# Altium PCB ShutdownDPDT-P01-V01.PcbDoc
Units mm, origin at the board's own origin, x right, y up, seen from the top; angles counter-clockwise.
Board outline 227 x 54.1 mm, 2 copper layers (Top Layer, Bottom Layer); 90 components, 111 nets, 414 pads, 30 vias.
Unrouted connection lines stored in the file: 24.
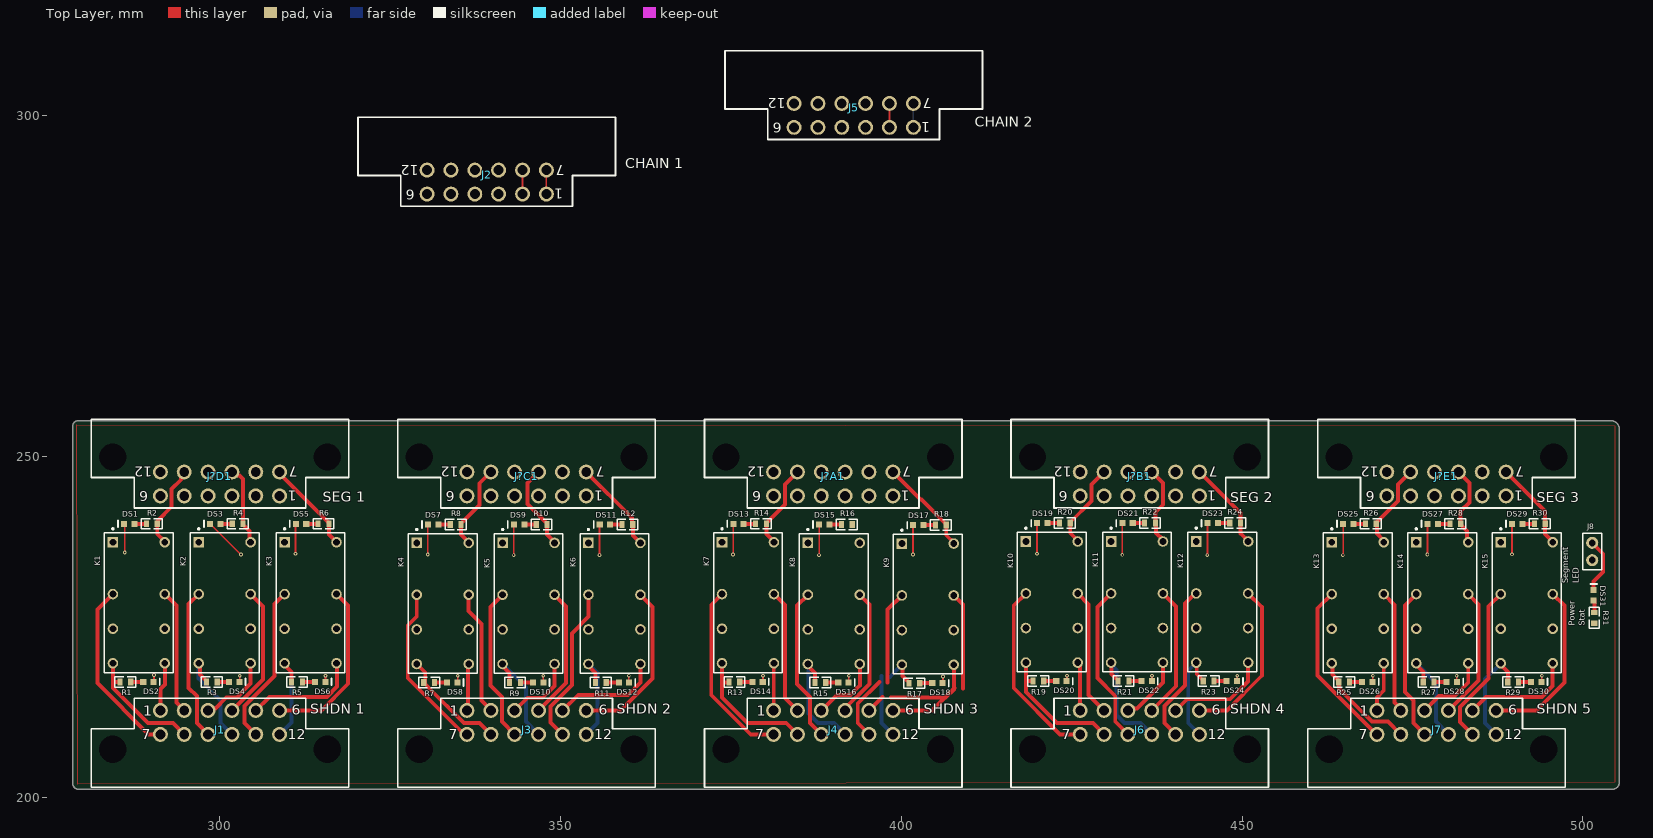
[diagram p0: Top Layer view]
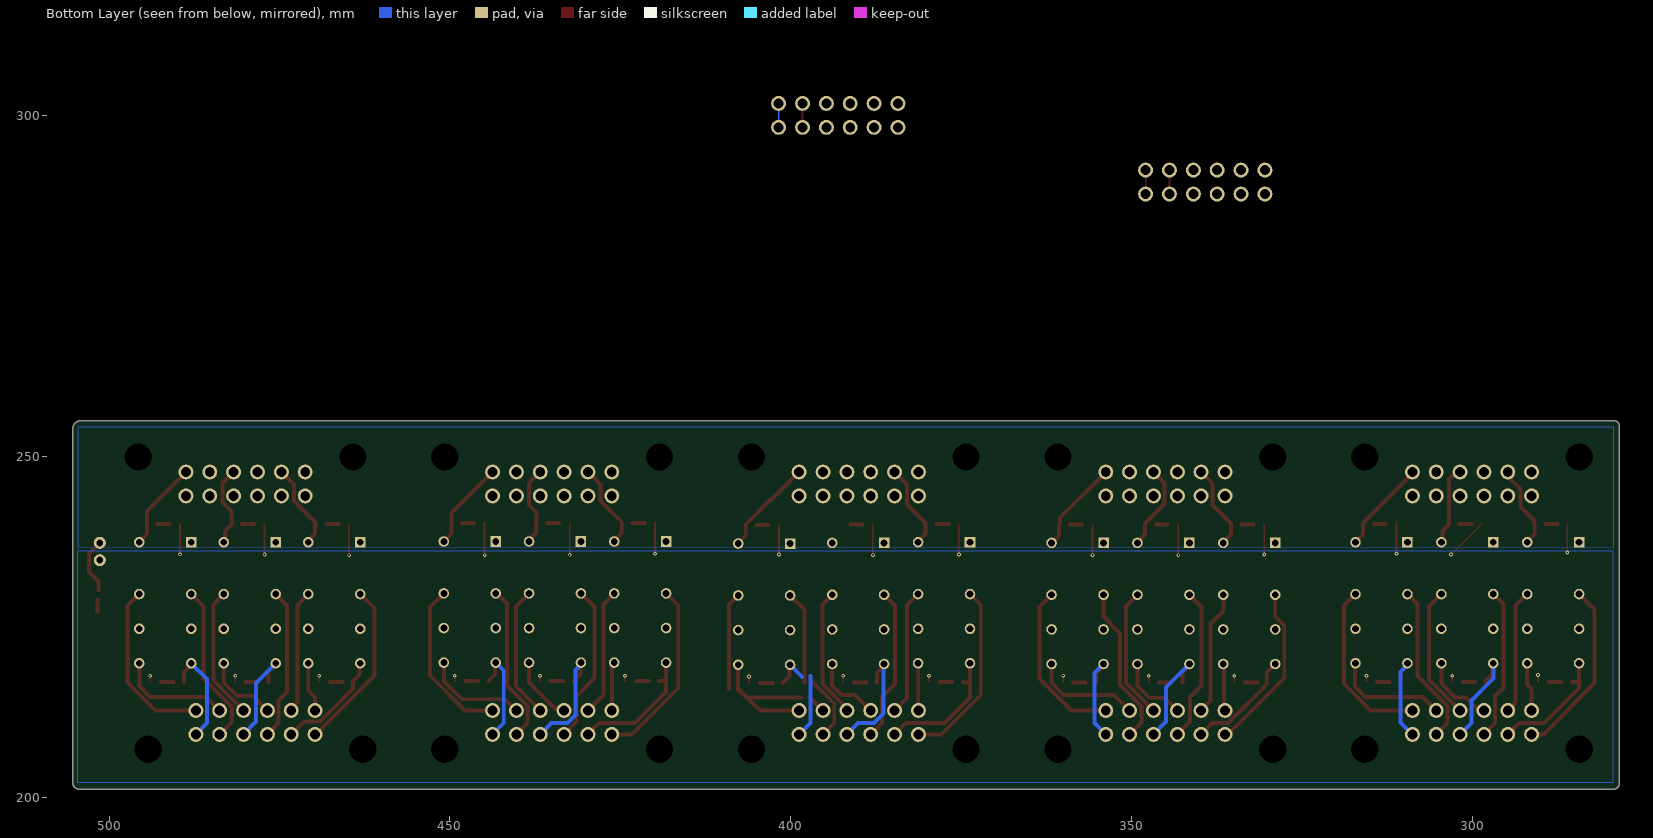
[diagram p1: Bottom Layer view, seen from below]
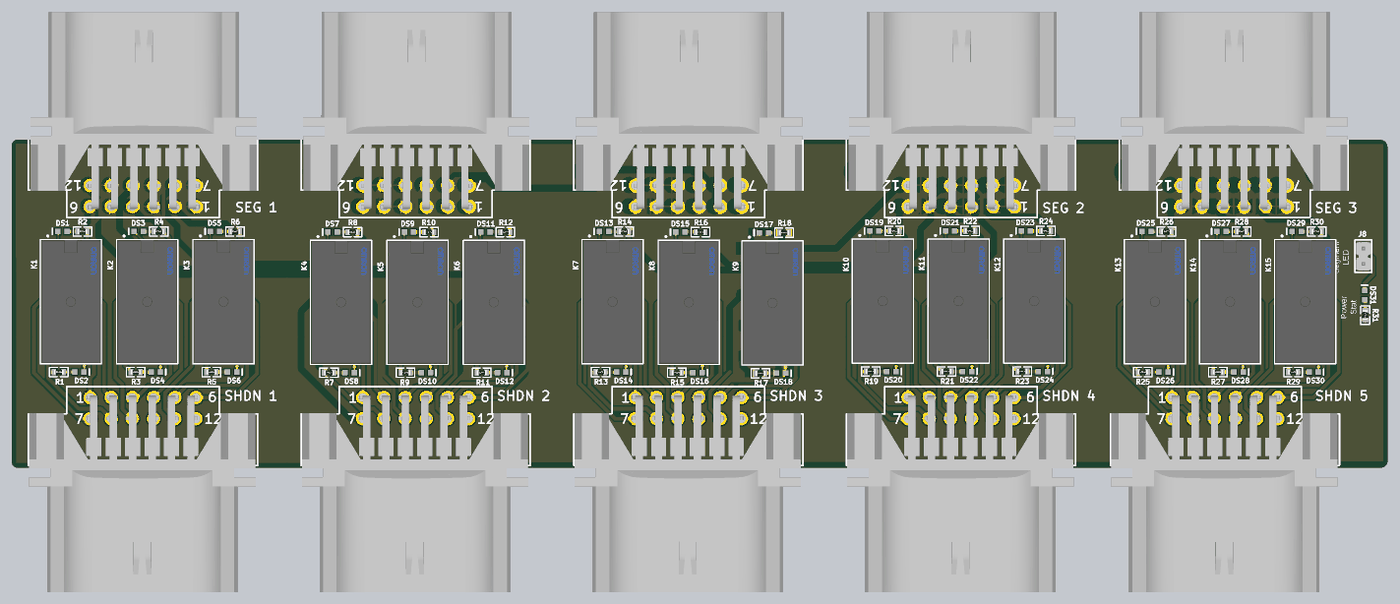
[diagram p2: 3D render of the assembled board from above, using the file's embedded part models]

## Layer stack, top to bottom
Top Solder: solder mask 0.0102, Solder Resist, Dk 3.5
Top Layer: signal copper 0.0356
Dielectric 1: dielectric 0.32, FR-4, Dk 4.8
Bottom Layer: signal copper 0.0356
Bottom Solder: solder mask 0.0102, Solder Resist, Dk 3.5

## Board outline
278.378,201.954 278.378,254.3 278.378,254.429 cw(c279.19,254.416) 279.203,255.229 504.128,255.229 cw(c504.128,253.979) 505.378,253.979 505.378,253.9 505.378,202.149 cw(c504.358,202.149) 504.358,201.129 279.303,201.129 cw(c279.253,202.004)

## Design rules (kind name [scope] priority, off if disabled: settings)
Clearance [All] p1: gap=0.254 ignorepadtopadclearanceinfootprint=FALSE except(0: Arc-Hole Track-Hole SMDPad-Hole THPad-Hole Via-Hole Fill-Hole Poly-Hole Region-Hole Text-Hole)
PlaneConnect PlaneConnect_1 [InNet('12V')] p1: planeconnectstyle=Direct reliefexpansion=0.508 reliefentries=4 reliefconductorwidth=0.254 reliefairgap=0.254
PlaneConnect [All] p2: planeconnectstyle=Direct reliefexpansion=0.508 reliefentries=4 reliefconductorwidth=0.254 reliefairgap=0.254
PolygonConnect "12V Rule" [InNet('12V')] p1: thpad.connectstyle=Relief thpad.reliefconductorwidth=0.254 thpad.reliefentries=4 thpad.polygonreliefangle="90 Angle" thpad.airgapwidth=0.254 smdpad.connectstyle=Relief smdpad.reliefconductorwidth=0.254 smdpad.reliefentries=4 smdpad.polygonreliefangle="90 Angle" smdpad.airgapwidth=0.254 via.connectstyle=Direct via.reliefconductorwidth=0.254 via.reliefentries=4 via.polygonreliefangle="90 Angle" via.airgapwidth=0.254
PolygonConnect [All] p2: thpad.connectstyle=Relief thpad.reliefconductorwidth=0.254 thpad.reliefentries=4 thpad.polygonreliefangle="90 Angle" thpad.airgapwidth=0.254 smdpad.connectstyle=Relief smdpad.reliefconductorwidth=0.254 smdpad.reliefentries=4 smdpad.polygonreliefangle="90 Angle" smdpad.airgapwidth=0.254 via.connectstyle=Direct via.reliefconductorwidth=0.254 via.reliefentries=4 via.polygonreliefangle="90 Angle" via.airgapwidth=0.254
RoomDefinition RelayGroup5 [InComponentClass('RelayGroup5')] p1 off: confinementstyle=ConfineIn formatcopy=TRUE lockcomponents=FALSE outline 506.499,359.299 540.899,359.299 540.899,399.699 506.499,399.699
RoomDefinition RelayGroup4 [InComponentClass('RelayGroup4')] p2 off: confinementstyle=ConfineIn formatcopy=TRUE lockcomponents=FALSE outline 280.8,180 319.7,180 319.7,281.5 280.8,281.5
RoomDefinition RelayGroup3 [InComponentClass('RelayGroup3')] p3 off: confinementstyle=ConfineIn formatcopy=TRUE lockcomponents=FALSE outline 506.499,279.899 540.899,279.899 540.899,320.299 506.499,320.299
RoomDefinition RelayGroup2 [InComponentClass('RelayGroup2')] p4 off: confinementstyle=ConfineIn formatcopy=TRUE lockcomponents=FALSE outline 506.499,240.2 540.899,240.2 540.899,280.599 506.499,280.599
RoomDefinition RelayGroup1 [InComponentClass('RelayGroup1')] p5 off: confinementstyle=ConfineIn formatcopy=TRUE lockcomponents=FALSE outline 506.499,200.6 540.899,200.6 540.899,241 506.499,241
RoomDefinition DPDT_Relay_15 [InComponentClass('DPDT_Relay_15')] p6: confinementstyle=ConfineIn formatcopy=TRUE lockcomponents=FALSE outline 351,214.5 363.3,214.5 363.3,242.3 351,242.3
RoomDefinition DPDT_Relay_16 [InComponentClass('DPDT_Relay_16')] p7: confinementstyle=ConfineIn formatcopy=TRUE lockcomponents=FALSE outline 325.8,214.5 338.1,214.5 338.1,242.3 325.8,242.3
RoomDefinition DPDT_Relay_11 [InComponentClass('DPDT_Relay_11')] p8: confinementstyle=ConfineIn formatcopy=TRUE lockcomponents=FALSE outline 397,214.4 409.3,214.4 409.3,242.2 397,242.2
RoomDefinition DPDT_Relay_19 [InComponentClass('DPDT_Relay_19')] p9: confinementstyle=ConfineIn formatcopy=TRUE lockcomponents=FALSE outline 484.9,214.6 497.2,214.6 497.2,242.4 484.9,242.4
RoomDefinition DPDT_Relay_12 [InComponentClass('DPDT_Relay_12')] p10: confinementstyle=ConfineIn formatcopy=TRUE lockcomponents=FALSE outline 370.6,214.6 382.9,214.6 382.9,242.4 370.6,242.4
RoomDefinition DPDT_Relay_14 [InComponentClass('DPDT_Relay_14')] p11: confinementstyle=ConfineIn formatcopy=TRUE lockcomponents=FALSE outline 415.2,214.7 427.5,214.7 427.5,242.5 415.2,242.5
RoomDefinition DPDT_Relay_22 [InComponentClass('DPDT_Relay_22')] p12: confinementstyle=ConfineIn formatcopy=TRUE lockcomponents=FALSE outline 427.7,214.7 440,214.7 440,242.5 427.7,242.5
RoomDefinition DPDT_Relay_13 [InComponentClass('DPDT_Relay_13')] p13: confinementstyle=ConfineIn formatcopy=TRUE lockcomponents=FALSE outline 440.2,214.7 452.5,214.7 452.5,242.5 440.2,242.5
RoomDefinition DPDT_Relay_21 [InComponentClass('DPDT_Relay_21')] p14: confinementstyle=ConfineIn formatcopy=TRUE lockcomponents=FALSE outline 383.2,214.5 395.5,214.5 395.5,242.3 383.2,242.3
RoomDefinition DPDT_Relay_18 [InComponentClass('DPDT_Relay_18')] p15: confinementstyle=ConfineIn formatcopy=TRUE lockcomponents=FALSE outline 281.2,214.6 293.5,214.6 293.5,242.4 281.2,242.4
RoomDefinition DPDT_Relay_17 [InComponentClass('DPDT_Relay_17')] p16: confinementstyle=ConfineIn formatcopy=TRUE lockcomponents=FALSE outline 306.4,214.6 318.7,214.6 318.7,242.4 306.4,242.4
RoomDefinition DPDT_Relay_23 [InComponentClass('DPDT_Relay_23')] p17: confinementstyle=ConfineIn formatcopy=TRUE lockcomponents=FALSE outline 338.4,214.5 350.7,214.5 350.7,242.3 338.4,242.3
RoomDefinition DPDT_Relay_24 [InComponentClass('DPDT_Relay_24')] p18: confinementstyle=ConfineIn formatcopy=TRUE lockcomponents=FALSE outline 293.8,214.6 306.1,214.6 306.1,242.4 293.8,242.4
RoomDefinition DPDT_Relay_25 [InComponentClass('DPDT_Relay_25')] p19: confinementstyle=ConfineIn formatcopy=TRUE lockcomponents=FALSE outline 472.5,214.6 484.8,214.6 484.8,242.4 472.5,242.4
RoomDefinition DPDT_Relay_110 [InComponentClass('DPDT_Relay_110')] p20: confinementstyle=ConfineIn formatcopy=TRUE lockcomponents=FALSE outline 460.1,214.6 472.4,214.6 472.4,242.4 460.1,242.4
RoomDefinition ShutdownDPDT-S01-V00 [InComponentClass('ShutdownDPDT-S01-V00')] p21 off: confinementstyle=ConfineIn formatcopy=TRUE lockcomponents=FALSE outline 178.943,24.892 248.666,24.892 248.666,65.278 178.943,65.278
RoutingVias [All] p1: holewidth=0.711 width=1.27 viastyle="Through Hole" minholewidth=0.711 minwidth=1.27 maxholewidth=0.711 maxwidth=1.27
SolderMaskExpansion [All] p1: expansion=0.102 istentingtop=FALSE
Width [All] p1: maxlimit=0.58 minlimit=0.254 preferedwidth=0.254 minimp=50.000000 maximp=50.000000 favimp=50.000000
29 further rules are at their usual default settings.

## Classes and differential pairs
component class RelayGroup5: J7 J?E1
component class RelayGroup4: J1 J?D1
component class RelayGroup3: J3 J?C1
component class RelayGroup2: J6 J?B1
component class RelayGroup1: J4 J?A1
component class DPDT_Relay_110: DS25 DS26 K13 R25 R26
component class DPDT_Relay_25: DS27 DS28 K14 R27 R28
component class DPDT_Relay_19: DS29 DS30 K15 R29 R30
component class DPDT_Relay_11: DS17 DS18 K9 R17 R18
component class DPDT_Relay_18: DS1 DS2 K1 R1 R2
component class DPDT_Relay_16: DS7 DS8 K4 R7 R8
channel class ShutdownDPDT-S04-V00-RelayGroup: C1 C2 C3 C4
channel class ShutdownDPDT-S02-V00-Relay: DPDT_Relay_12 DPDT_Relay_13 DPDT_Relay_14 DPDT_Relay_15 DPDT_Relay_17 DPDT_Relay_21 DPDT_Relay_22 DPDT_Relay_23 DPDT_Relay_24 DPDT_Relay_31 DPDT_Relay_32
component class ShutdownDPDT-S01-V00: DS31 J2 J8 R31
component class DPDT_Relay_17: DS5 DS6 K3 R5 R6
component class DPDT_Relay_15: DS11 DS12 K6 R11 R12
component class DPDT_Relay_24: DS3 DS4 K2 R3 R4
component class DPDT_Relay_23: DS9 DS10 K5 R9 R10
component class DPDT_Relay_22: DS21 DS22 K11 R21 R22
component class DPDT_Relay_21: DS15 DS16 K8 R15 R16
component class DPDT_Relay_14: DS19 DS20 K10 R19 R20
component class DPDT_Relay_13: DS23 DS24 K12 R23 R24
component class DPDT_Relay_12: DS13 DS14 K7 R13 R14

## Components (designator, comment, footprint, x,y, rotation, side; value= is the part's Value field where it differs from the comment)
DS1 "LED Red 0603" "LED RED 0603" 286.7,240.1 r180 top
DS2 "LED Red 0603" "LED RED 0603" 289.5,216.9 r0 top
DS3 "LED Red 0603" "LED RED 0603" 299.3,240.1 r180 top (schematic designator DS1)
DS4 "LED Red 0603" "LED RED 0603" 302.1,216.9 r0 top (schematic designator DS2)
DS5 "LED Red 0603" "LED RED 0603" 311.9,240.1 r180 top (schematic designator DS1)
DS6 "LED Red 0603" "LED RED 0603" 314.7,216.9 r0 top (schematic designator DS2)
DS7 "LED Red 0603" "LED RED 0603" 331.3,240 r180 top (schematic designator DS1)
DS8 "LED Red 0603" "LED RED 0603" 334.1,216.8 r0 top (schematic designator DS2)
DS9 "LED Red 0603" "LED RED 0603" 343.9,240 r180 top (schematic designator DS1)
DS10 "LED Red 0603" "LED RED 0603" 346.7,216.8 r0 top (schematic designator DS2)
DS11 "LED Red 0603" "LED RED 0603" 356.5,240 r180 top (schematic designator DS1)
DS12 "LED Red 0603" "LED RED 0603" 359.3,216.8 r0 top (schematic designator DS2)
DS13 "LED Red 0603" "LED RED 0603" 376.1,240.1 r180 top (schematic designator DS1)
DS14 "LED Red 0603" "LED RED 0603" 378.9,216.9 r0 top (schematic designator DS2)
DS15 "LED Red 0603" "LED RED 0603" 388.7,240 r180 top (schematic designator DS1)
DS16 "LED Red 0603" "LED RED 0603" 391.5,216.8 r0 top (schematic designator DS2)
DS17 "LED Red 0603" "LED RED 0603" 402.5,239.9 r180 top (schematic designator DS1)
DS18 "LED Red 0603" "LED RED 0603" 405.3,216.7 r0 top (schematic designator DS2)
DS19 "LED Red 0603" "LED RED 0603" 420.7,240.2 r180 top (schematic designator DS1)
DS20 "LED Red 0603" "LED RED 0603" 423.5,217 r0 top (schematic designator DS2)
DS21 "LED Red 0603" "LED RED 0603" 433.2,240.2 r180 top (schematic designator DS1)
DS22 "LED Red 0603" "LED RED 0603" 436,217 r0 top (schematic designator DS2)
DS23 "LED Red 0603" "LED RED 0603" 445.7,240.2 r180 top (schematic designator DS1)
DS24 "LED Red 0603" "LED RED 0603" 448.5,217 r0 top (schematic designator DS2)
DS25 "LED Red 0603" "LED RED 0603" 465.6,240.1 r180 top (schematic designator DS1)
DS26 "LED Red 0603" "LED RED 0603" 468.4,216.9 r0 top (schematic designator DS2)
DS27 "LED Red 0603" "LED RED 0603" 478,240.1 r180 top (schematic designator DS1)
DS28 "LED Red 0603" "LED RED 0603" 480.8,216.9 r0 top (schematic designator DS2)
DS29 "LED Red 0603" "LED RED 0603" 490.4,240.1 r180 top (schematic designator DS1)
DS30 "LED Red 0603" "LED RED 0603" 493.2,216.9 r0 top (schematic designator DS2)
DS31 "LED Green 0603" "LED GREEN 0603" 501.6,229.6 r90 top (schematic designator DS3)
J1 "MX120G" MX120G 300,212.7 r0 top (schematic designator J3)
J2 "MX120G" MX120G 339.15,288.5 r180 top
J3 "MX120G" MX120G 345,212.7 r0 top
J4 "MX120G" MX120G 390,212.7 r0 top (schematic designator J3)
J5 "MX120G" MX120G 393.009,298.288 r180 top (schematic designator J1)
J6 "MX120G" MX120G 435,212.7 r0 top (schematic designator J3)
J7 "MX120G" MX120G 478.55,212.7 r0 top (schematic designator J3)
J8 "Jumper 2Way Pins" Jumper_2Way_Pin 501.4,237.3 r90 top (schematic designator J5)
J?A1 "MX120G" MX120G 390,244.2 r180 top (schematic designator J?)
J?B1 "MX120G" MX120G 435,244.2 r180 top (schematic designator J?)
J?C1 "MX120G" MX120G 345,244.2 r180 top (schematic designator J?)
J?D1 "MX120G" MX120G 300,244.2 r180 top (schematic designator J?)
J?E1 "MX120G" MX120G 480,244.2 r180 top (schematic designator J?)
K1 "G5V-2-DC12" FP-G5V-2-DC12-MFG 288.09,228.51 r270 top
K2 "G5V-2-DC12" FP-G5V-2-DC12-MFG 300.69,228.51 r270 top (schematic designator K1)
K3 "G5V-2-DC12" FP-G5V-2-DC12-MFG 313.29,228.51 r270 top (schematic designator K1)
K4 "G5V-2-DC12" FP-G5V-2-DC12-MFG 332.69,228.41 r270 top (schematic designator K1)
K5 "G5V-2-DC12" FP-G5V-2-DC12-MFG 345.29,228.41 r270 top (schematic designator K1)
K6 "G5V-2-DC12" FP-G5V-2-DC12-MFG 357.89,228.41 r270 top (schematic designator K1)
K7 "G5V-2-DC12" FP-G5V-2-DC12-MFG 377.49,228.51 r270 top (schematic designator K1)
K8 "G5V-2-DC12" FP-G5V-2-DC12-MFG 390.09,228.41 r270 top (schematic designator K1)
K9 "G5V-2-DC12" FP-G5V-2-DC12-MFG 403.89,228.31 r270 top (schematic designator K1)
K10 "G5V-2-DC12" FP-G5V-2-DC12-MFG 422.09,228.61 r270 top (schematic designator K1)
K11 "G5V-2-DC12" FP-G5V-2-DC12-MFG 434.59,228.61 r270 top (schematic designator K1)
K12 "G5V-2-DC12" FP-G5V-2-DC12-MFG 447.09,228.61 r270 top (schematic designator K1)
K13 "G5V-2-DC12" FP-G5V-2-DC12-MFG 466.99,228.51 r270 top (schematic designator K1)
K14 "G5V-2-DC12" FP-G5V-2-DC12-MFG 479.39,228.51 r270 top (schematic designator K1)
K15 "G5V-2-DC12" FP-G5V-2-DC12-MFG 491.79,228.51 r270 top (schematic designator K1)
R1 "1k 5% 0603" Res_ThinFilm_0603 286.1,216.9 r180 top (schematic designator R2)
R2 "1k 5% 0603" Res_ThinFilm_0603 290,240.1 r0 top (schematic designator R1)
R3 "1k 5% 0603" Res_ThinFilm_0603 298.8,216.9 r180 top (schematic designator R2)
R4 "1k 5% 0603" Res_ThinFilm_0603 302.6,240.1 r0 top (schematic designator R1)
R5 "1k 5% 0603" Res_ThinFilm_0603 311.3,216.9 r180 top (schematic designator R2)
R6 "1k 5% 0603" Res_ThinFilm_0603 315.2,240.1 r0 top (schematic designator R1)
R7 "1k 5% 0603" Res_ThinFilm_0603 330.7,216.8 r180 top (schematic designator R2)
R8 "1k 5% 0603" Res_ThinFilm_0603 334.6,240 r0 top (schematic designator R1)
R9 "1k 5% 0603" Res_ThinFilm_0603 343.3,216.8 r180 top (schematic designator R2)
R10 "1k 5% 0603" Res_ThinFilm_0603 347.2,240 r0 top (schematic designator R1)
R11 "1k 5% 0603" Res_ThinFilm_0603 355.9,216.8 r180 top (schematic designator R2)
R12 "1k 5% 0603" Res_ThinFilm_0603 359.8,240 r0 top (schematic designator R1)
R13 "1k 5% 0603" Res_ThinFilm_0603 375.5,216.9 r180 top (schematic designator R2)
R14 "1k 5% 0603" Res_ThinFilm_0603 379.4,240.1 r0 top (schematic designator R1)
R15 "1k 5% 0603" Res_ThinFilm_0603 388.1,216.8 r180 top (schematic designator R2)
R16 "1k 5% 0603" Res_ThinFilm_0603 392,240 r0 top (schematic designator R1)
R17 "1k 5% 0603" Res_ThinFilm_0603 401.9,216.7 r180 top (schematic designator R2)
R18 "1k 5% 0603" Res_ThinFilm_0603 405.8,239.9 r0 top (schematic designator R1)
R19 "1k 5% 0603" Res_ThinFilm_0603 420.1,217 r180 top (schematic designator R2)
R20 "1k 5% 0603" Res_ThinFilm_0603 424,240.2 r0 top (schematic designator R1)
R21 "1k 5% 0603" Res_ThinFilm_0603 432.6,217 r180 top (schematic designator R2)
R22 "1k 5% 0603" Res_ThinFilm_0603 436.5,240.2 r0 top (schematic designator R1)
R23 "1k 5% 0603" Res_ThinFilm_0603 445.1,217 r180 top (schematic designator R2)
R24 "1k 5% 0603" Res_ThinFilm_0603 449,240.2 r0 top (schematic designator R1)
R25 "1k 5% 0603" Res_ThinFilm_0603 465,216.9 r180 top (schematic designator R2)
R26 "1k 5% 0603" Res_ThinFilm_0603 468.9,240.1 r0 top (schematic designator R1)
R27 "1k 5% 0603" Res_ThinFilm_0603 477.4,216.9 r180 top (schematic designator R2)
R28 "1k 5% 0603" Res_ThinFilm_0603 481.3,240.1 r0 top (schematic designator R1)
R29 "1k 5% 0603" Res_ThinFilm_0603 489.8,216.9 r180 top (schematic designator R2)
R30 "1k 5% 0603" Res_ThinFilm_0603 493.7,240.1 r0 top (schematic designator R1)
R31 "10k 1% 0603" Res_ThinFilm_0603 501.7,226.3 r270 top (schematic designator R3)

## Footprints (in the part's own frame and the unit in brackets; to place one, negate y for a bottom-side part, rotate by r counter-clockwise, add the part's x,y. Pads: shape width x height; smd on the part's side, far side on the other; paste and mask are expansions set on the pad)
FP-G5V-2-DC12-MFG [mm]
  rect 1.55x1.55 hole 1 paste-1000 mask+0: 1(-8.89,-3.81)
  round 1.55 hole 1 paste-1000 mask+0: 4(-1.27,-3.81) 6(3.81,-3.81) 8(8.89,-3.81) 9(8.89,3.81) 11(3.81,3.81) 13(-1.27,3.81) 16(-8.89,3.81)
  silkscreen extent -10.97,-5.05 10.25,5.05, body extent -10.35,-5.15 10.35,5.15, height 0.25
Jumper_2Way_Pin [mil]
  round 70 hole 40: 1(-100,0) 2(0,0)
  silkscreen extent -155,-55 55,55, body extent -142,-48 42,47, height 332
"LED GREEN 0603" [mil]
  rect 35x35 smd: 1(-30,0) 2(30,0)
  silkscreen extent 65,-20 65,20, body extent -40,-20 40,20, height 30
"LED RED 0603" [mil]
  rect 35x35 smd: 1(-30,0) 2(30,0)
  silkscreen extent 65,-20 65,20, body extent -40,-20 40,20, height 30
MX120G [mm]
  round 2.2 hole 1.45: 1(-8.75,0) 2(-5.25,0) 3(-1.75,0) 4(1.75,0) 5(5.25,0) 6(8.75,0) 7(-8.75,-3.5) 8(-5.25,-3.5) 9(-1.75,-3.5) 10(1.75,-3.5) 11(5.25,-3.5) 12(8.75,-3.5)
  round 0 hole 4 mask+0.254: NC(-15.75,-5.7) NC(15.75,-5.7)
  silkscreen extent -18.9,-11.25 18.9,1.8, body extent -18.78,-32.1 18.58,0.36, height 24.48
Res_ThinFilm_0603 [mil]
  rect 30x40 smd: 1(-31.24,0) 2(31.24,0)
  silkscreen extent -60,-30 60,30, body extent -31,-16 32,16, height 18

## Part data
J1 J2 J3 J4 J5 J6 J7 J?A1 J?B1 J?C1 J?D1 J?E1: "MX120G with standard connector layout"
J8: library part "Jumper 2Way Vert Pins", "Jumper 2Way Vert Pins"
K1 K2 K3 K4 K5 K6 K7 K8 K9 K10 K11 K12 K13 K14 K15: library part CMP-08823-000082-1, "RELAY GEN PURPOSE DPDT 2A 12VDC", Case/Package=DIP, Coil Current=41.7mA, Coil Power=500mW, Coil Resistance=288R, Coil Voltage (DC)=12V, Contact Current Rating=2A, Manufacturer Series=G5V-2, Max Operating Temperature=65°C, Max Voltage Rating (AC)=125V, Min Operating Temperature=-25°C, Package Quantity=25, Approvals=UL, Coil Type=Non-Latching, Contact Material=Gold, Current Rating=2A, Depth=10.1mm, Height=11.5mm, Lead Free="Lead Free", Length=20.5mm, Max Current Rating=2A, Max Voltage Rating (DC)=125V, Mount="Through Hole", Number of Pins=8, Operate Time=7ms, Packaging=Rail/Tube, Power Consumption=500mW, Power Rating=500mW, Radiation Hardening=No, Reference Standard=UL, Relay Action=MOMENTARY, Relay Function=DPDT, Relay Type="General Purpose", Release Time=3ms, Series=G5V-2, Termination="PC Pin", Throw Configuration=DPDT, Type=Electromechanical, Voltage Rating (AC)=125V, Voltage Rating (DC)=125V, Weight=5g, Width=10.1mm
R1 R2 R3 R4 R5 R6 R7 R8 R9 R10 R11 R12 R13 R14 R15 R16 R17 R18 R19 R20 R21 R22 R23 R24 R25 R26 R27 R28 R29 R30: "Resistor, SMD, 1k, 0.1W, 5%, 0603"
R31: "Resistor, SMD, 10k, 0.1W, 1%, 0603"

## Via types
v1: diameter 0.55, hole 0.279, Top Layer to Bottom Layer, 30 vias

## Nets (pads, with @x,y where several pads share a name; then routed paths per layer and width w, separated by ;. In a path a pad name is that pad's centre, name@x,y a point inside that pad or via, vN(x,y) a via of type N, cw(c..) or ccw(c..) an arc to the next point about the centre after c; other vN are vias at no path point)
12V: J2.4 J2.5 J2.10 J2.11 J5.4 J5.5 J5.10 J5.11 J?A1.8 J?A1.10 J?A1.12 J?B1.8 J?B1.10 J?B1.12 J?C1.8 J?C1.10 J?C1.12 J?D1.8 J?D1.10 J?D1.12 J?E1.8 J?E1.10 J?E1.12 R31.2
CANH: J2.2 J2.8 J5.2 J5.8 | length 7
  Top Layer w0.254: J2.2 J2.8 ; J5.2 J5.8
CANL: J2.1 J2.7 J5.1 J5.7 | length 7
  Top Layer w0.254: J2.1 J2.7
  Bottom Layer w0.254: J5.1 J5.7
DET_IN_1A: J4.2 K7.13 | length 18.5
  Top Layer w0.58: K7.13 382.9,228.18 382.9,214.55 J4.2
DET_IN_1B: J6.2 K10.13 | length 18.8
  Top Layer w0.58: K10.13 427.5,228.28 427.5,214.95 J6.2
DET_IN_1C: J3.2 K4.13 | length 18.3
  Top Layer w0.58: K4.13 336.5,227.3 338.4,225.4 338.4,214.136 339.75,212.786 J3.2
DET_IN_1D: J1.2 K1.13 | length 18.3
  Top Layer w0.58: K1.13 293.6,228.08 293.6,213.85 J1.2
DET_IN_1E: J7.2 K13.13 | length 18.1
  Top Layer w0.58: K13.13 472.4,228.18 472.4,213.85 473.3,212.95 J7.2
DET_IN_2A: J4.4 K8.13 | length 19
  Top Layer w0.58: J4.4 391.75,213.029 395.3,216.579 395.3,228.28 K8.13
DET_IN_2B: J6.4 K11.13 | length 19.4
  Top Layer w0.58: J6.4 436.75,212.704 440.3,216.254 440.3,227.98 K11.13
DET_IN_2C: J3.4 K5.13 | length 19.4
  Top Layer w0.58: J3.4 346.75,212.704 350.8,216.754 350.8,227.98 K5.13
DET_IN_2D: J1.4 K2.13 | length 19.7
  Top Layer w0.58: J1.4 301.75,212.704 306.3,217.254 306.3,227.98 K2.13
DET_IN_2E: J7.4 K14.13 | length 19.5
  Top Layer w0.58: J7.4 480.3,212.704 484.7,217.104 484.7,228.28 K14.13
DET_IN_3A: J4.6 K9.13 | length 24.7
  Top Layer w0.58: J4.6 404.5,212.7 407.819,216.019 ; K9.13 409.019,228.261 409.019,215.919
DET_IN_3B: J6.6 K12.13 | length 24.2
  Top Layer w0.58: J6.6 447.8,212.7 452.9,217.8 452.9,227.88 K12.13
DET_IN_3C: J3.6 K6.13 | length 24.7
  Top Layer w0.58: J3.6 358.8,212.7 363.5,217.4 363.5,227.88 K6.13
DET_IN_3D: J1.6 K3.13 | length 25.5
  Top Layer w0.58: J1.6 314.879,212.7 318.8,216.621 318.8,228.08 K3.13
DET_IN_3E: J7.6 K15.13 | length 25.4
  Top Layer w0.58: J7.6 493.2,212.7 497.3,216.8 497.3,228.08 K15.13
DET_OUT_1A: J4.1 K7.9 | length 6.9
  Top Layer w0.58: J4.1 381.275,212.725 381.275,219.595 K7.9
DET_OUT_1B: J6.1 K10.9 | length 7.2
  Top Layer w0.58: K10.9 425.9,219.458 426.25,219.108 J6.1
DET_OUT_1C: J3.1 K4.9 | length 6.9
  Top Layer w0.58: J3.1 336.375,212.825 336.375,219.395 K4.9
DET_OUT_1D: J1.1 K1.9 | length 7.2
  Top Layer w0.58: J1.1 291.25,215.83 291.9,216.48 K1.9
DET_OUT_1E: J7.1 K13.9 | length 7.3
  Top Layer w0.58: J7.1 469.8,214.6 470.8,215.6 K13.9
DET_OUT_2A: J4.3 K8.9 | length 10.3
  Top Layer w0.58: J4.3 390.55,215 392.541,215 393.9,216.359 K8.9
DET_OUT_2B: J6.3 K11.9 | length 9.8
  Top Layer w0.58: J6.3 433.56,213.01 434.61,213.01 438.4,216.8 K11.9
DET_OUT_2C: J3.3 K5.9 | length 10.6
  Top Layer w0.58: J3.3 345.12,214.57 347.37,214.57 349.1,216.3 K5.9
DET_OUT_2D: J1.3 K2.9 | length 10.9
  Top Layer w0.58: J1.3 298.56,213.01 299.31,213.01 300.92,214.62 302.486,214.62 304.5,216.634 K2.9
DET_OUT_2E: J7.3 K14.9 | length 10.9
  Top Layer w0.58: J7.3 478.9,214.8 481.216,214.8 483.2,216.784 K14.9
DET_OUT_3A: J4.5 K9.9 | length 16.2
  Top Layer w0.58: J4.5 397.25,214.7 ; 398.45,214.6 406.5,214.6 407.7,215.8 K9.9
DET_OUT_3B: J6.5 K12.9 | length 15.2
  Top Layer w0.58: J6.5 441.894,214.344 448.264,214.344 450.9,216.98 K12.9
DET_OUT_3C: J3.5 K6.9 | length 15.9
  Top Layer w0.58: J3.5 350.279,212.7 352.579,215 359.92,215 361.7,216.78 K6.9
DET_OUT_3D: J1.5 K3.9 | length 16.9
  Top Layer w0.58: J1.5 307.25,214.7 315.7,214.7 317.2,216.2 317.2,219.52 K3.9
DET_OUT_3E: J7.5 K15.9 | length 16.6
  Top Layer w0.58: J7.5 485.8,214.7 494.021,214.7 495.6,216.279 K15.9
GND: DS31.2 J2.3 J2.6 J2.9 J2.12 J5.3 J5.6 J5.9 J5.12 J8.2 K1.1 K2.1 K3.1 K4.1 K5.1 K6.1 K7.1 K8.1 K9.1 K10.1 K11.1 K12.1 K13.1 K14.1 K15.1 | length 8.2
  Top Layer w0.58: J8.2 503,235.7 503,233 501.6,231.6 DS31.2
"LED GND": DS1.2 DS2.2 DS3.2 DS4.2 DS5.2 DS6.2 DS7.2 DS8.2 DS9.2 DS10.2 DS11.2 DS12.2 DS13.2 DS14.2 DS15.2 DS16.2 DS17.2 DS18.2 DS19.2 DS20.2 DS21.2 DS22.2 DS23.2 DS24.2 DS25.2 DS26.2 DS27.2 DS28.2 DS29.2 DS30.2 J8.1 | length 83.5
  Top Layer w0.254: DS1.2 286.02,240.018 v1(286.02,235.9) ; DS2.2 290.3,216.938 v1(290.3,217.9) ; DS3.2 303.038,235.6 v1(303.1,235.6) ; DS4.2 302.9,216.938 v1(302.9,217.8) ; v1(311.1,235.7) 311.1,240.062 DS5.2 ; DS6.2 315.5,216.938 v1(315.5,217.8) ; v1(330.5,235.6) 330.5,239.962 DS7.2 ; DS8.2 334.9,216.838 v1(334.9,217.8) ; v1(343.1,235.5) 343.1,239.962 DS9.2 ; v1(347.447,217.8) 347.447,216.815 DS10.2 ; v1(355.7,235.5) 355.7,239.962 DS11.2 ; v1(360.009,217.813) 360.009,216.853 DS12.2 ; v1(375.3,235.6) 375.338,235.638 DS13.2 ; DS14.2 379.7,216.938 v1(379.7,217.8) ; v1(387.9,235.5) 387.938,235.538 DS15.2 ; DS16.2 392.3,216.838 v1(392.3,217.8) ; v1(401.7,235.6) 401.7,239.862 DS17.2 ; DS18.2 406.1,216.738 v1(406.1,217.7) ; v1(419.9,235.7) 419.9,240.162 DS19.2 ; DS20.2 424.3,217.038 v1(424.3,217.8) ; v1@432.4,235.5 v1(432.438,235.538) DS21.2 ; DS22.2 436.8,217.038 v1(436.8,217.8) ; v1(444.9,235.5) 444.938,235.538 DS23.2 ; DS24.2 449.3,217.038 v1(449.3,217.8) ; v1(464.8,235.5) 464.838,235.538 DS25.2 ; DS26.2 469.2,216.938 v1(469.2,217.8) ; v1(477.2,235.6) 477.238,235.638 DS27.2 ; v1(481.5,217.8) 481.5,216.962 DS28.2 ; v1@489.6,235.6 489.638,235.638 DS29.2 ; DS30.2 494,216.938 v1(494,217.8)
  other v1: 489.619,235.619
NetDS1A_1: DS17.1 R18.1 | length 1.7
  Top Layer w0.58: DS17.1 R18.1
NetDS1B_1: DS13.1 R14.1 | length 1.7
  Top Layer w0.58: DS13.1 R14.1
NetDS1C_1: DS15.1 R16.1 | length 1.7
  Top Layer w0.58: DS15.1 R16.1
NetDS1D_1: DS23.1 R24.1 | length 1.7
  Top Layer w0.58: DS23.1 R24.1
NetDS1E_1: DS19.1 R20.1 | length 1.7
  Top Layer w0.58: DS19.1 R20.1
NetDS1F_1: DS21.1 R22.1 | length 1.7
  Top Layer w0.58: DS21.1 R22.1
NetDS1G_1: DS11.1 R12.1 | length 1.7
  Top Layer w0.58: DS11.1 R12.1
NetDS1H_1: DS7.1 R8.1 | length 1.7
  Top Layer w0.58: DS7.1 R8.1
NetDS1I_1: DS9.1 R10.1 | length 1.7
  Top Layer w0.58: DS9.1 R10.1
NetDS1J_1: DS5.1 R6.1 | length 1.7
  Top Layer w0.58: DS5.1 R6.1
NetDS1K_1: DS1.1 R2.1 | length 1.7
  Top Layer w0.58: DS1.1 R2.1
NetDS1L_1: DS3.1 R4.1 | length 1.7
  Top Layer w0.58: DS3.1 R4.1
NetDS1M_1: DS29.1 R30.1 | length 1.7
  Top Layer w0.58: DS29.1 R30.1
NetDS1N_1: DS25.1 R26.1 | length 1.7
  Top Layer w0.58: DS25.1 R26.1
NetDS1O_1: DS27.1 R28.1 | length 1.7
  Top Layer w0.58: DS27.1 R28.1
NetDS2A_1: DS18.1 R17.1 | length 1.8
  Top Layer w0.58: R17.1 DS18.1
NetDS2B_1: DS14.1 R13.1 | length 1.8
  Top Layer w0.58: R13.1 DS14.1
NetDS2C_1: DS16.1 R15.1 | length 1.8
  Top Layer w0.58: R15.1 DS16.1
NetDS2D_1: DS24.1 R23.1 | length 1.8
  Top Layer w0.58: R23.1 DS24.1
NetDS2E_1: DS20.1 R19.1 | length 1.8
  Top Layer w0.58: R19.1 DS20.1
NetDS2F_1: DS22.1 R21.1 | length 1.8
  Top Layer w0.58: R21.1 DS22.1
NetDS2G_1: DS12.1 R11.1 | length 1.8
  Top Layer w0.58: R11.1 DS12.1
NetDS2H_1: DS8.1 R7.1 | length 1.8
  Top Layer w0.58: R7.1 DS8.1
NetDS2I_1: DS10.1 R9.1 | length 1.8
  Top Layer w0.58: R9.1 DS10.1
NetDS2J_1: DS6.1 R5.1 | length 1.8
  Top Layer w0.58: R5.1 DS6.1
NetDS2K_1: DS2.1 R1.1 | length 1.8
  Top Layer w0.58: R1.1 DS2.1
NetDS2L_1: DS4.1 R3.1 | length 1.7
  Top Layer w0.58: R3.1 DS4.1
NetDS2M_1: DS30.1 R29.1 | length 1.8
  Top Layer w0.58: R29.1 DS30.1
NetDS2N_1: DS26.1 R25.1 | length 1.8
  Top Layer w0.58: R25.1 DS26.1
NetDS2O_1: DS28.1 R27.1 | length 1.8
  Top Layer w0.58: R27.1 DS28.1
NetDS3_1: DS31.1 R31.1 | length 1.8
  Top Layer w0.58: DS31.1@501.7,228.938 501.7,227.284 501.791,227.193 R31.1@501.8,227.193
NetJ?A_7: J?A1.7 K9.16 R18.2 | length 14.3
  Top Layer w0.58: J?A1.7 398.793,247.7 402.838,243.655 402.965,243.655 406.593,240.027 R18.2 406.593,238.42 407.7,237.313 K9.16
NetJ?A_9: J?A1.9 K8.16 R16.2
NetJ?A_11: J?A1.11 K7.16 R14.2 | length 12.6
  Top Layer w0.58: K7.16 381.3,237.513 380.193,238.62 R14.2 380.193,240.227 382.894,242.928 382.894,245.844 J?A1.11
NetJ?B_7: J?B1.7 K12.16 R24.2 | length 13.2
  Top Layer w0.58: J?B1.7 449.793,241.657 R24.2 449.793,238.707 450.9,237.6 K12.16
NetJ?B_9: J?B1.9 K11.16 R22.2 | length 11.8
  Top Layer w0.58: J?B1.9 438.394,246.056 438.394,242.894 437.293,241.793 R22.2 437.384,240.109 437.384,238.916 437.4,238.9 437.4,238.762 438.4,237.762 K11.16
NetJ?B_11: J?B1.11 K10.16 R20.2 | length 12.7
  Top Layer w0.58: K10.16 425.9,237.613 424.793,238.72 R20.2 424.793,240.327 427.894,243.428 427.894,245.844 J?B1.11
NetJ?C_7: J?C1.7 K6.16 R12.2 | length 13.7
  Top Layer w0.58: J?C1.7 360.502,240.948 360.502,240.091 R12.2 360.593,238.407 K6.16
NetJ?C_9: J?C1.9 K5.16 R10.2 | length 12.7
  Top Layer w0.58: J?C1.9 345.106,246.056 345.106,243.014 347.993,240.127 R10.2 347.993,238.52 349.1,237.413 K5.16
NetJ?C_11: J?C1.11 K4.16 R8.2 | length 12.7
  Top Layer w0.58: K4.16 336.5,237.413 335.393,238.52 R8.2 335.393,240.127 338.1,242.834 338.1,246.05 J?C1.11
NetJ?D_7: J?D1.7 K3.16 R6.2 | length 13.7
  Top Layer w0.58: J?D1.7@309.4,247.7 309.164,247.464 309.164,247.056 315.902,240.318 315.902,240.191 R6.2 315.993,238.507 K3.16
NetJ?D_9: J?D1.9 K2.16 R4.2 | length 11.1
  Top Layer w0.58: J?D1.9@302.4,247.488 302.676,247.212 302.888,247.212 303.4,246.7 303.4,242.417 303.393,242.41 R4.2 303.393,239.973 304.321,239.045 304.321,237.579 K2.16
NetJ?D_11: J?D1.11 K1.16 R2.2 | length 12.6
  Top Layer w0.58: K1.16 291.9,237.513 290.793,238.62 R2.2 290.884,240.191 290.884,240.584 292.9,242.6 292.9,245.2 294.262,246.562 294.262,246.774 J?D1.11@295.188,247.7
NetJ?E_7: J?E1.7 K15.16 R30.2 | length 13.1
  Top Layer w0.58: J?E1.7 494.493,241.957 R30.2 494.493,238.62 495.6,237.513 K15.16
NetJ?E_9: J?E1.9 K14.16 R28.2 | length 12
  Top Layer w0.58: J?E1.9 483.394,246.056 483.394,243.25 482.093,241.949 R28.2 482.093,239.973 483.021,239.045 483.021,237.579 K14.16
NetJ?E_11: J?E1.11 K13.16 R26.2 | length 12.9
  Top Layer w0.58: K13.16 470.8,237.662 469.8,238.662 469.8,239.1 469.784,239.116 469.784,240.009 R26.2 469.693,240.227 472.894,243.428 472.894,245.844 J?E1.11
SHDN_IN_1A: J4.8 K7.8 R13.2 | length 19.4
  Top Layer w0.58: K7.8 373.68,216.8 ; R13.2 374.707,216.891 374.616,216.8 373.68,216.8 ; J4.8 383.106,210.844 377.435,210.844 373.68,214.599 373.68,216.8
SHDN_IN_1B: J6.8 K10.8 R19.2 | length 19.4
  Top Layer w0.58: K10.8 418.28,217 ; R19.2 418.28,217 ; J6.8 428.106,210.844 422.835,210.844 418.28,215.399 418.28,217
SHDN_IN_1C: J3.8 K4.8 R7.2 | length 16.2
  Top Layer w0.58: K4.8 330.125,218.275 330.125,216.582 330.568,216.138 330.568,216.057 335.781,210.844 338.106,210.844 J3.8
SHDN_IN_1D: J1.8 K1.8 R1.2 | length 17.9
  Top Layer w0.58: K1.8 284.3,219.6 284.3,216.9 ; R1.2 284.3,216.9 ; J1.8 293.106,210.844 289.456,210.844 284.3,216 284.3,216.9
SHDN_IN_1E: J7.8 K13.8 R25.2 | length 16
  Top Layer w0.58: K13.8 463.259,219.541 463.259,217.975 464.207,217.027 464.207,215.893 467.5,212.6 469.045,211.055 471.445,211.055 J7.8
SHDN_IN_2A: J4.10 K8.8 R15.2 | length 17.1
  Top Layer w0.58: K8.8 386.28,219.258 387.307,218.231 R15.2
  Bottom Layer w0.58: K8.8 386.394,219.406 386.394,212.231 387.781,210.844 390.106,210.844 J4.10
SHDN_IN_2B: J6.10 K11.8 R21.2 | length 17.5
  Top Layer w0.58: K11.8 430.859,219.641 430.859,218.075 431.807,217.127 R21.2
  Bottom Layer w0.58: K11.8 430.78,219.458 431.606,218.632 431.606,212.019 432.781,210.844 435.106,210.844 J6.10
SHDN_IN_2C: J3.10 K5.8 R9.2 | length 15.6
  Top Layer w0.58: K5.8 341.48,219.258 342.507,218.231 R9.2
  Bottom Layer w0.58: K5.8 344.894,216.106 344.894,211.056 J3.10
SHDN_IN_2D: J1.10 K2.8 R3.2 | length 15.6
  Top Layer w0.58: K2.8 297.059,219.441 297.059,217.975 298.007,217.027 R3.2
  Bottom Layer w0.58: K2.8 296.88,217.42 300.106,214.194 300.106,210.844 J1.10
SHDN_IN_2E: J7.10 K14.8 R27.2 | length 15.5
  Top Layer w0.58: K14.8 475.58,219.358 476.607,218.331 R27.2
  Bottom Layer w0.58: K14.8 478.444,216.756 478.444,211.056 J7.10
SHDN_IN_3A: J4.12 K9.8 R17.2 | length 14.9
  Top Layer w0.58: K9.8 400.159,219.341 400.159,217.775 401.107,216.827 R17.2
  Bottom Layer w0.58: 397.106,217.746 397.106,210.844 J4.12 ; 398.306,217.646 K9.8
SHDN_IN_3B: J6.12 K12.8 R23.2 | length 14.8
  Top Layer w0.58: K12.8 443.359,219.641 443.359,218.075 444.307,217.127 R23.2
  Bottom Layer w0.58: K12.8 442.106,218.546 442.106,210.844 J6.12
SHDN_IN_3C: J3.12 K6.8 R11.2 | length 14.7
  Top Layer w0.58: K6.8 354.08,219.258 355.107,218.231 R11.2
  Bottom Layer w0.58: J3.12 355.394,210.844 355.394,218.206 K6.8
SHDN_IN_3D: J1.12 K3.8 R5.2 | length 14.7
  Top Layer w0.58: K3.8 309.48,219.358 310.507,218.331 R5.2
  Bottom Layer w0.58: J1.12 310.5,210.95 310.5,218.338 309.48,219.358 K3.8
SHDN_IN_3E: J7.12 K15.8 R29.2 | length 15.2
  Top Layer w0.58: K15.8 487.98,219.358 489.007,218.331 R29.2
  Bottom Layer w0.58: J7.12 485.656,210.844 485.656,217.296 K15.8
SHDN_OUT_1A: J4.7 K7.4 | length 27
  Top Layer w0.58: K7.4 372.1,228.2 372.1,215 377.9,209.2 J4.7
SHDN_OUT_1B: J6.7 K10.4 | length 27.2
  Top Layer w0.58: K10.4 416.5,228.1 416.5,216 423.3,209.2 J6.7
SHDN_OUT_1C: J3.7 K4.4 | length 24.9
  Top Layer w0.58: K4.4 328.88,226.465 327.561,225.146 327.561,217.487 335.848,209.2 J3.7
SHDN_OUT_1D: J1.7 K1.4 | length 26.4
  Top Layer w0.58: K1.4 282,227.5 282,216.7 289.5,209.2 J1.7
SHDN_OUT_1E: J7.7 K13.4 | length 25.1
  Top Layer w0.58: K13.4 461.1,227.7 461.1,217.821 469.721,209.2 J7.7
SHDN_OUT_2A: J4.9 K8.4 | length 22.6
  Top Layer w0.58: K8.4 384.7,228.1 384.7,216.6 386.606,214.694 386.606,210.844 J4.9
SHDN_OUT_2B: J6.9 K11.4 | length 23.3
  Top Layer w0.58: K11.4 428.8,227.9 428.8,217.444 431.394,214.85 431.394,211.056 J6.9
SHDN_OUT_2C: J3.9 K5.4 | length 22.7
  Top Layer w0.58: K5.4 339.7,227.9 339.7,216.344 341.394,214.65 341.394,211.056 J3.9
SHDN_OUT_2D: J1.9 K2.4 | length 22.4
  Top Layer w0.58: K2.4 295.4,228.3 295.4,216 296.606,214.794 296.606,210.844 J1.9
SHDN_OUT_2E: J7.9 K14.4 | length 22.5
  Top Layer w0.58: K14.4 473.9,228.1 473.9,215.4 475.156,214.144 475.156,210.844 J7.9
SHDN_OUT_3A: J4.11 K9.4 | length 23.4
  Top Layer w0.58: J4.11 393.6,210.85 393.6,213.7 396.8,216.9 ; 398,216.8 398,227.5 K9.4
SHDN_OUT_3B: J6.11 K12.4 | length 23.4
  Top Layer w0.58: J6.11 438.606,210.844 438.606,213.381 441.6,216.375 441.6,228.4 443.08,229.88 K12.4
SHDN_OUT_3C: J3.11 K6.4 | length 23.5
  Top Layer w0.58: J3.11 348.5,210.95 348.5,213.275 351.634,216.409 351.634,224.019 354.08,226.465 K6.4
SHDN_OUT_3D: J1.11 K3.4 | length 23.7
  Top Layer w0.58: J1.11 303.6,210.85 303.6,213.375 308,217.775 308,228.3 K3.4
SHDN_OUT_3E: J7.11 K15.4 | length 23.8
  Top Layer w0.58: J7.11 482,211 482,213.225 485.075,216.3 486.2,217.425 486.2,228 K15.4
pads on no net: J1.NC J2.NC J3.NC J4.NC J5.NC J6.NC J7.NC J?A1.1 J?A1.2 J?A1.3 J?A1.4 J?A1.5 J?A1.6 J?A1.NC J?B1.1 J?B1.2 J?B1.3 J?B1.4 J?B1.5 J?B1.6 J?B1.NC J?C1.1 J?C1.2 J?C1.3 J?C1.4 J?C1.5 J?C1.6 J?C1.NC J?D1.1 J?D1.2 J?D1.3 J?D1.4 J?D1.5 J?D1.6 J?D1.NC J?E1.1 J?E1.2 J?E1.3 J?E1.4 J?E1.5 J?E1.6 J?E1.NC K1.6 K1.11 K2.6 K2.11 K3.6 K3.11 K4.6 K4.11 K5.6 K5.11 K6.6 K6.11 K7.6 K7.11 K8.6 K8.11 K9.6 K9.11 K10.6 K10.11 K11.6 K11.11 K12.6 K12.11 K13.6 K13.11 K14.6 K14.11 K15.6 K15.11

## Polygon pours and split planes (outlines as drawn)
GND on Bottom Layer "GNDP" (solid, shelved, pour order 2): 279.2,236.753 279.2,254.3 504.6,254.3 504.6,236.553
"LED GND" on Bottom Layer "LED GND" (solid, shelved, pour order 1): 279.269,202.149 279.269,236.1 504.7,236.1 504.7,202.149
12V on Top Layer "GNDP" (solid, shelved, pour order 0): 279,254.6 504.7,254.5 504.7,202.149 279.1,201.9

## Other copper
Top Layer:

## Silkscreen, mask and mechanical layers (free items; w line width, h text height)
Top Overlay:
  text "CHAIN 2" at 410.754,298.354 h1.52
  text "CHAIN 1" at 359.454,292.254 h1.52
  text "SEG 1" at 315.054,243.354 h1.52
  text "SEG 2" at 448.254,243.254 h1.52
  text "SEG 3" at 493.254,243.254 h1.52
  text "Segment / LED" at 499.7,231.369 h1.5 r90
  text "Power / Stat" at 500.6,225.1 h1.5 r90
  text "SHDN 1" at 313.254,212.254 h1.52
  text "SHDN 2" at 358.254,212.254 h1.52
  text "SHDN 3" at 403.254,212.254 h1.52
  text "SHDN 4" at 448.254,212.254 h1.52
  text "SHDN 5" at 493.254,212.254 h1.52
Mechanical 1:
  lines w1: 278.378,254.3 278.378,201.954 ccw(c279.253,202.004) 279.303,201.129 504.358,201.129 ccw(c504.358,202.149) 505.378,202.149 505.378,253.9 ; 278.378,254.429 cw(c279.19,254.416) 279.203,255.229 504.128,255.229 cw(c504.128,253.979) 505.378,253.979

## Text inside footprints (layer, text, board x,y; h text height)
J1: Top Overlay "1" at 288.754,211.954 h1.52; Top Overlay "7" at 288.554,208.454 h1.52; Top Overlay "6" at 310.554,212.054 h1.52; Top Overlay "12" at 309.954,208.454 h1.52
J2: Top Overlay "1" at 350.396,289.246 h1.52 r180; Top Overlay "7" at 350.596,292.746 h1.52 r180; Top Overlay "6" at 328.596,289.146 h1.52 r180; Top Overlay "12" at 329.196,292.746 h1.52 r180
J3: Top Overlay "1" at 333.754,211.954 h1.52; Top Overlay "7" at 333.554,208.454 h1.52; Top Overlay "6" at 355.554,212.054 h1.52; Top Overlay "12" at 354.954,208.454 h1.52
J4: Top Overlay "1" at 378.754,211.954 h1.52; Top Overlay "7" at 378.554,208.454 h1.52; Top Overlay "6" at 400.554,212.054 h1.52; Top Overlay "12" at 399.954,208.454 h1.52
J5: Top Overlay "1" at 404.255,299.034 h1.52 r180; Top Overlay "7" at 404.455,302.534 h1.52 r180; Top Overlay "6" at 382.455,298.934 h1.52 r180; Top Overlay "12" at 383.055,302.534 h1.52 r180
J6: Top Overlay "1" at 423.754,211.954 h1.52; Top Overlay "7" at 423.554,208.454 h1.52; Top Overlay "6" at 445.554,212.054 h1.52; Top Overlay "12" at 444.954,208.454 h1.52
J7: Top Overlay "12" at 488.504,208.454 h1.52; Top Overlay "6" at 489.104,212.054 h1.52; Top Overlay "7" at 467.104,208.454 h1.52; Top Overlay "1" at 467.304,211.954 h1.52
J?A1: Top Overlay "1" at 401.246,244.946 h1.52 r180; Top Overlay "7" at 401.446,248.446 h1.52 r180; Top Overlay "6" at 379.446,244.846 h1.52 r180; Top Overlay "12" at 380.046,248.446 h1.52 r180
J?B1: Top Overlay "1" at 446.246,244.946 h1.52 r180; Top Overlay "7" at 446.446,248.446 h1.52 r180; Top Overlay "6" at 424.446,244.846 h1.52 r180; Top Overlay "12" at 425.046,248.446 h1.52 r180
J?C1: Top Overlay "1" at 356.246,244.946 h1.52 r180; Top Overlay "7" at 356.446,248.446 h1.52 r180; Top Overlay "6" at 334.446,244.846 h1.52 r180; Top Overlay "12" at 335.046,248.446 h1.52 r180
J?D1: Top Overlay "1" at 311.246,244.946 h1.52 r180; Top Overlay "7" at 311.446,248.446 h1.52 r180; Top Overlay "6" at 289.446,244.846 h1.52 r180; Top Overlay "12" at 290.046,248.446 h1.52 r180
J?E1: Top Overlay "1" at 491.246,244.946 h1.52 r180; Top Overlay "7" at 491.446,248.446 h1.52 r180; Top Overlay "6" at 469.446,244.846 h1.52 r180; Top Overlay "12" at 470.046,248.446 h1.52 r180